# EAGLE board ParaQuad_v6 (EAGLE 9.3.0)
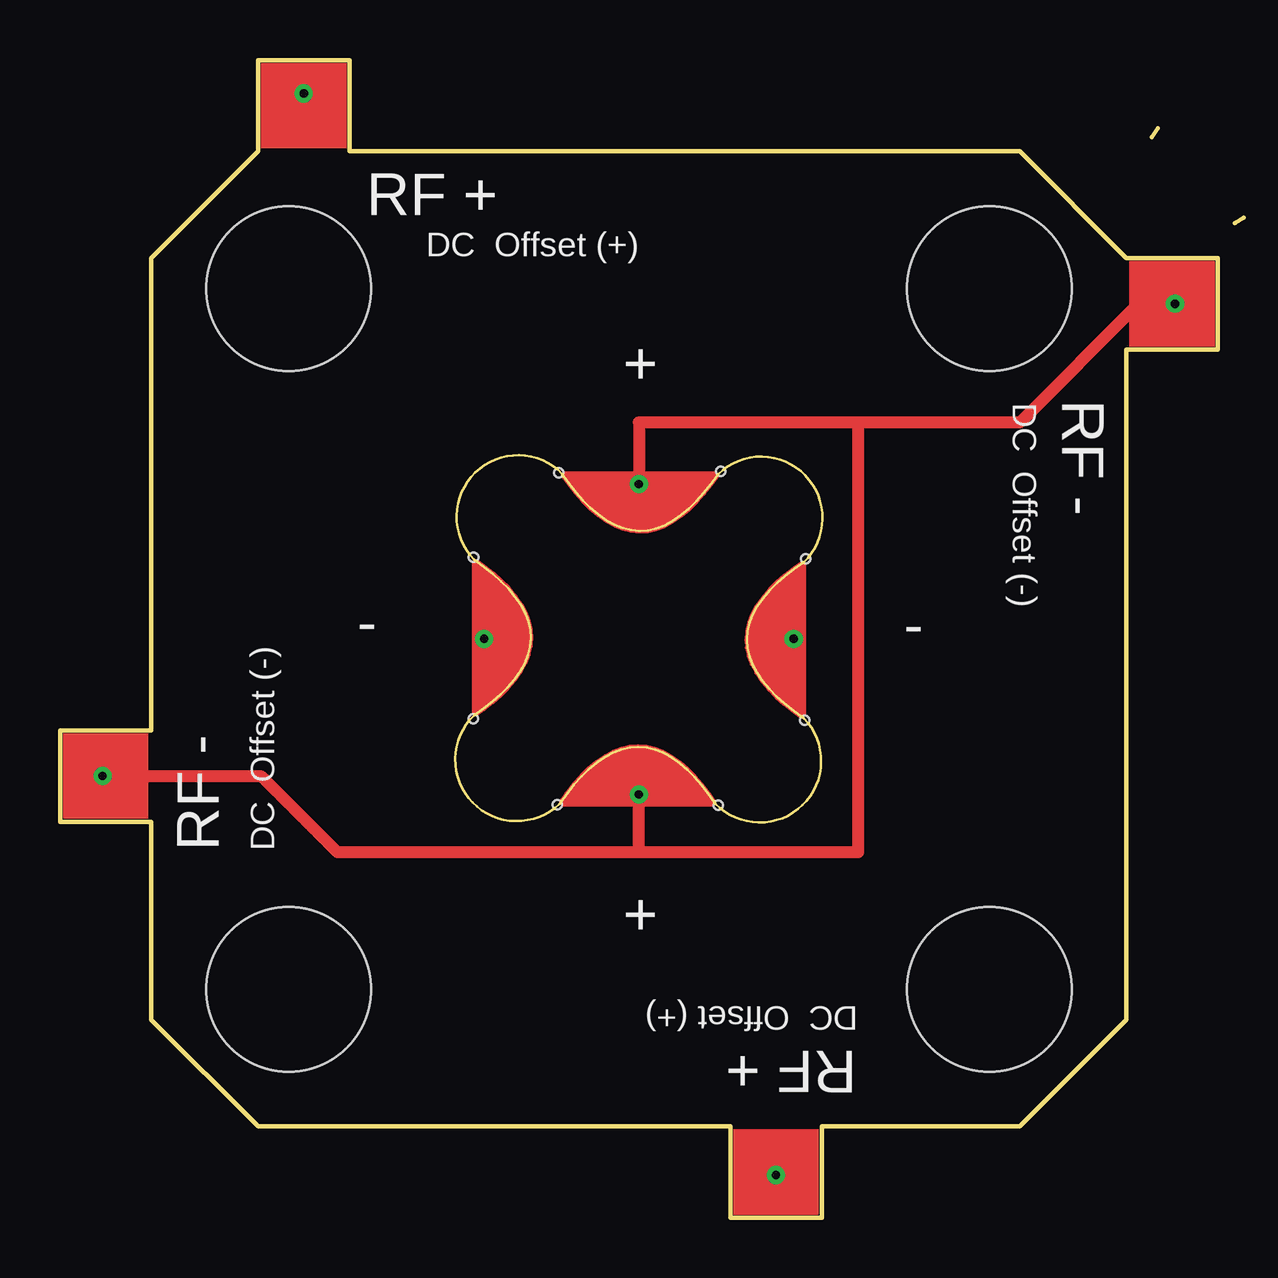
[diagram p0: board, top side]
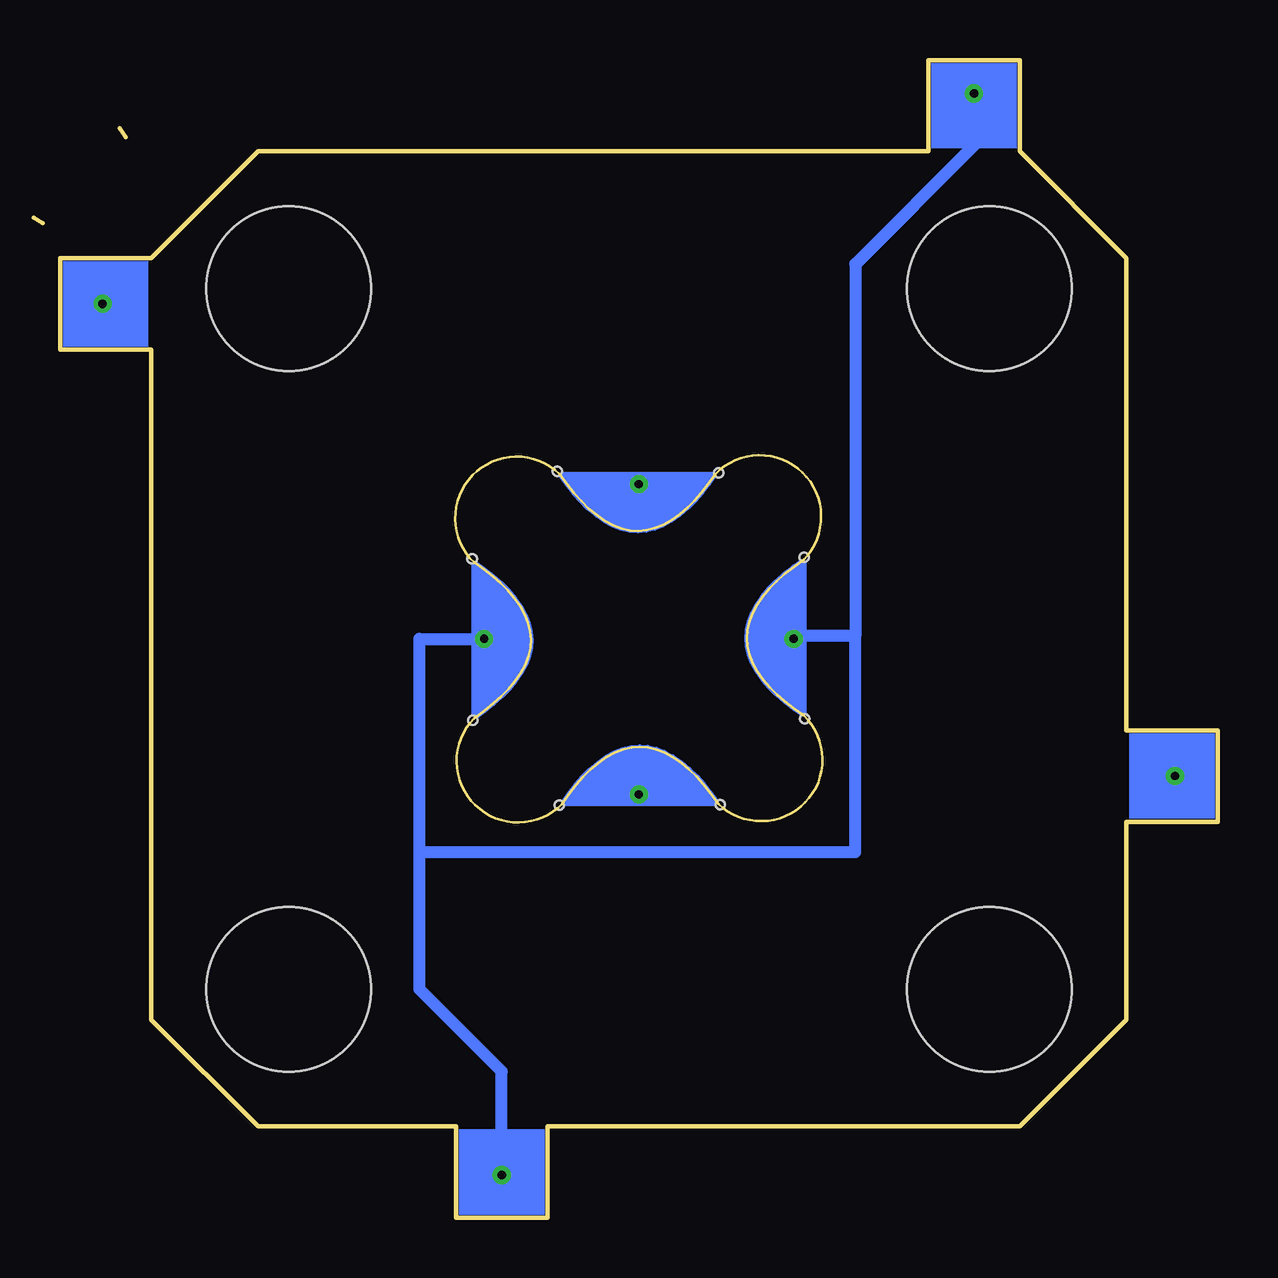
[diagram p1: board, bottom side, seen from below]

Size 48.26 x 48.26 mm. Coordinates in mm from the lower left corner, seen from the top.
Outline: 8.25,3.81 3.81,8.25 3.81,16.51 0,16.51 0,20.32 3.81,20.32 3.81,40 8.25,44.45 8.25,48.26 12.06,48.26 12.06,44.45 40,44.45 44.45,40 48.26,40 48.26,36.2 44.45,36.2 44.45,8.25 40,3.81 31.75,3.81 31.75,0 27.94,0 27.94,3.81 8.25,3.81
Copper layers (1*16): Top 0.035mm / dielectric 1.5mm / Bottom 0.035mm
Design rules "default": minimum track width 10mil, minimum drill 24mil, track to track 8mil, track to pad 8mil, pad to pad 8mil, via to via 8mil, smd to smd 8mil, copper to edge 40mil, drill to drill 8mil, minimum pad ring 10mil, minimum via ring 8mil, stop-mask expansion 4mil, vias tented up to drill 0mil, thermal gap 10mil
Holes 0.38 mm at 20.73,17.21 17.23,20.8 27.44,17.2 31.05,20.75 31.08,27.46 27.54,31.11 20.8,31.06 17.24,27.54
Holes 6.86 mm at 9.52,38.73 9.52,9.52 38.73,9.52 38.73,38.73
Milling: 8 lines

## Placement (x,y rotation side)
E$1  [QUAD_CUTOUT_PARAB]  24.13,24.13 0 top
E$2  [ROUTER_MASK]  24.13,24.13 0 top

## Library data of the parts
E$1 E$2 = pcb_quad_v3

## Tracks (layer width: path | path; a pad name or v marks a point on that pad's centre or on a via)
S$1  (via drill 0.35)
  Top 0.508: 24.13,15.24 v24.13,17.65 24.13,17.68 | v24.13,30.58 24.13,33.15 33.27,33.15 | 33.27,33.15 40,33.15 44.96,38.1 v46.48,38.1 | v1.78,18.41 8.38,18.41 11.56,15.24 24.13,15.24 | 24.13,15.24 33.27,15.24 33.27,33.15
S$6  (via drill 0.35)
  Top 0.508: v10.16,46.86 10.17,46.85
  Bottom 0.508: 15.11,24.26 17.55,24.26 v17.68,24.13 | v30.58,24.13 33.27,24.13 33.27,15.24 | v10.16,46.86 10.16,44.7 15.11,39.75 15.11,24.26 | v29.84,1.78 29.84,6.1 33.27,9.52 33.27,15.24 | 33.27,15.24 15.11,15.24 15.11,24.26
(copper drawn outside any net)
  shapes: Bottom area x4, Top area x5

## Text on the board
tPlace: RF + | DC Offset (+) | + | DC Offset (-) | RF - | - | - | RF - | DC Offset (-) | + | DC Offset (+) | RF +